# EAGLE board lcd_midi_interface_a (EAGLE 5.06)
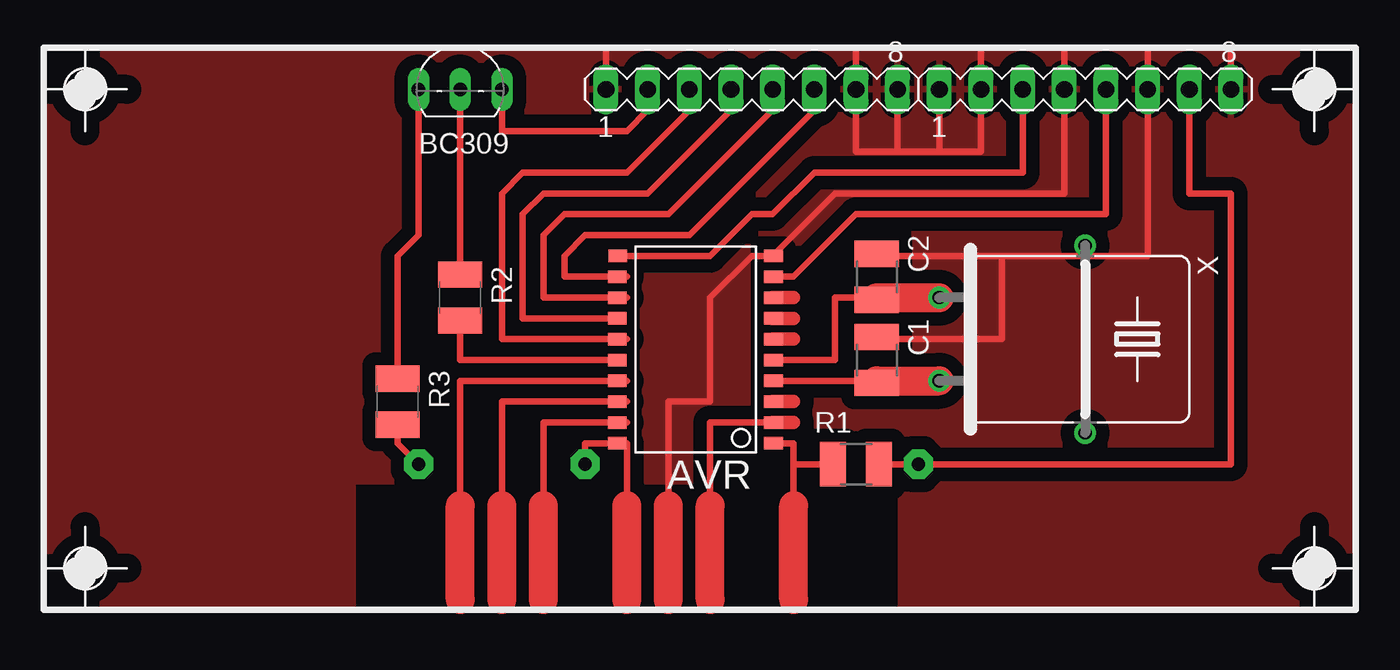
[diagram p0: board, top side]
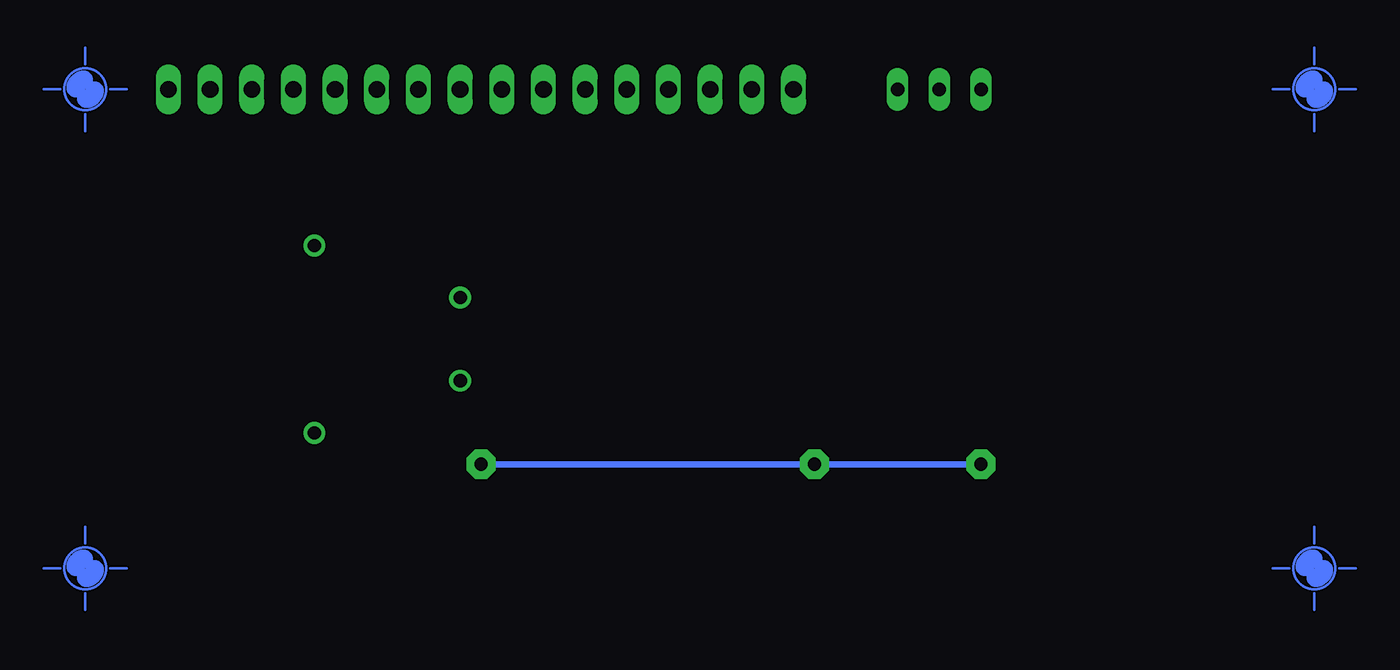
[diagram p1: board, bottom side, seen from below]

No outline drawn. Coordinates in mm, seen from the top.
Copper layers (1*16): Top 0.035mm / dielectric 1.5mm / Bottom 0.035mm
Design rules "default": minimum track width 10mil, minimum drill 24mil, track to track 32mil, track to pad 32mil, pad to pad 32mil, via to via 32mil, smd to smd 32mil, copper to edge 40mil, drill to drill 8mil, minimum pad ring 10mil, minimum via ring 8mil, stop-mask expansion 4mil, vias tented up to drill 0mil, thermal gap 10mil
tRestrict: area 8.9,0 to 41.9,7.6

## Footprints (pad centres in the part's own frame; a part is rotated, then mirrored left to right if it is on the bottom)
SO20L = smd 0.762 x 1.143: 1 -5.08,-5.131; 2 -3.81,-5.131; 3 -2.54,-5.131; 4 -1.27,-5.131; 5 0,-5.131; 6 1.27,-5.131; 7 2.54,-5.131; 8 3.81,-5.131; 9 5.08,-5.131; 10 6.35,-5.131; 11 6.35,4.369; 12 5.08,4.394; 13 3.81,4.394; 14 2.54,4.394; 15 1.27,4.394; 16 0,4.394; 17 -1.27,4.394; 18 -2.54,4.394; 19 -3.81,4.394; 20 -5.08,4.394
TO92-BEC = drill 0.813 long: B -2.54,0; C 2.54,0; E 0,0
R3225 = smd 1.6 x 2.7: 1 -1.4,0; 2 1.4,0
MA08-1 = drill 1.016 long: 1 -8.89,0; 2 -6.35,0; 3 -3.81,0; 4 -1.27,0; 5 1.27,0; 6 3.81,0; 7 6.35,0; 8 8.89,0
C3225 = smd 1.6 x 2.7: 1 -1.4,0; 2 1.4,0
HC18U-H = drill 0.813 round: 1 -2.54,-5.08; 2 2.54,-5.08; M -5.715,3.81; M1 5.715,3.81

## Placement (x,y rotation side)
AVR  ATTiny2313  [SO20L]  29.21,15.24 90 top
BC309  [TO92-BEC]  15.24,31.75 0 top
C1  22p  [R3225]  40.64,15.24 270 top
C2  22p  [R3225]  40.64,20.32 270 top
E$1  LCD 16x2 (HD44780 compatible)  [MA08-1]  33.02,31.75 0 top
E$2  [MA08-1]  53.34,31.75 0 top
E$5  [PASS-ROUND]  -7.62,31.75 0 top
E$10  [PASS-ROUND]  -7.62,2.54 0 top
E$11  [PASS-ROUND]  67.31,31.75 0 top
E$12  [PASS-ROUND]  67.31,2.54 0 top
R1  10k  [R3225]  39.37,8.89 0 top
R2  1k  [C3225]  15.24,19.05 270 top
R3  22  [C3225]  11.43,12.7 270 top
X  8.000 MHz  [HC18U-H]  49.53,16.51 270 top

## Library data of the parts
AVR = atmel
BC309 = transistor
C1 C2 R1-R3 = smd-ipc
E$1 E$2 = con-lstb
E$5 E$10-E$12 = marks
X = crystal

## Nets
GND: E$1.1 E$1.7 E$1.8 E$2.1 E$2.2 E$2.4 E$2.6 E$2.8
S$9: X.1
S$10: BC309.C E$1.2
S$12: X.2
S$14: BC309.B
S$15: E$1.6
S$16: E$1.5
S$17: E$1.4
S$18: E$1.3
S$21: BC309.E
S$22: E$2.3
S$32: E$2.7

## Tracks (layer width: path | path; a pad name or v marks a point on that pad's centre or on a via)
GND
  Top 0.406: E$2.8 62.23,34.29 57.15,34.29 | E$1.1 24.13,34.29 39.37,34.29 E$1.7 39.37,27.94 41.91,27.94 | 41.91,27.94 E$1.8 | 44.45,27.94 E$2.1 | 44.45,27.94 41.91,27.94 | 44.45,27.94 46.99,27.94 E$2.2 46.99,34.29 52.07,34.29 | 40.64,21.59 57.15,21.59 E$2.6 57.15,34.29 | 52.07,34.29 57.15,34.29 | 52.07,34.29 E$2.4 52.07,25.4 38.1,25.4 34.29,21.59 33.02,21.59 30.48,19.05 30.48,12.7 27.94,12.7 27.94,6.35 | 43.18,21.59 48.26,21.59 48.26,16.51 40.64,16.51
  Top 1.778: 27.94,0.64 27.94,6.35
  pour Top: -10.16,34.29 -10.16,0 69.85,0 69.85,34.29
S$2
  Top 0.406: 25.4,13.97 15.24,13.97 15.24,6.35
  Top 1.778: 15.24,0.64 15.24,6.35
S$3
  Top 0.406: 25.4,12.7 17.78,12.7 17.78,6.35
  Top 1.778: 17.78,0.64 17.78,6.35
S$4
  Top 0.406: 25.4,11.43 20.32,11.43 20.32,6.35
  Top 1.778: 20.32,0.64 20.32,6.35
S$5
  Top 0.406: 34.29,10.16 35.56,10.16 35.56,8.89 | 35.56,6.35 35.56,8.89 | 35.56,8.89 38.1,8.89
  Top 1.778: 35.56,0.64 35.56,6.35
S$8
  Top 0.406: 34.29,11.43 30.48,11.43 30.48,6.35
  Top 0.813: 34.29,11.43 35.56,11.43
  Top 1.778: 30.48,0.64 30.48,6.35
S$9
  Top 1.778: 40.64,19.05 X.1
S$10
  Top 0.406: BC309.C 17.78,29.21 25.4,29.21 26.67,30.48 E$1.2
S$11
  Top 0.406: 34.29,13.97 39.37,13.97
S$12
  Top 1.778: 40.64,13.97 X.2
S$13
  Top 0.406: 34.29,15.24 38.1,15.24 38.1,19.05 39.37,19.05
S$14
  Top 0.406: 11.43,13.97 11.43,21.59 12.7,22.86 BC309.B
S$15
  Top 0.406: 25.4,20.32 21.59,20.32 21.59,21.59 22.86,22.86 29.21,22.86 36.83,30.48 E$1.6
S$16
  Top 0.406: 25.4,19.05 20.32,19.05 20.32,22.86 21.59,24.13 27.94,24.13 34.29,30.48 E$1.5
S$17
  Top 0.406: 24.13,17.78 19.05,17.78 19.05,24.13 20.32,25.4 26.67,25.4 31.75,30.48 E$1.4
S$18
  Top 0.406: 25.4,16.51 17.78,16.51 17.78,25.4 19.05,26.67 25.4,26.67 29.21,30.48 E$1.3
S$19
  Top 0.406: 24.13,15.24 15.24,15.24 15.24,17.78
S$20
  Top 0.813: 34.29,19.05 35.56,19.05
S$21
  Top 0.406: 15.24,20.32 BC309.E
S$22
  Top 0.406: 25.4,21.59 30.48,21.59 33.02,24.13 34.29,24.13 36.83,26.67 49.53,26.67 E$2.3
S$23
  Top 0.406: 34.29,20.32 35.56,20.32 39.37,24.13 54.61,24.13 54.61,31.75
S$25
  Top 0.406: 25.4,6.35 25.4,10.16
  Top 1.778: 25.4,0.64 25.4,6.35
S$27
  Top 0.813: 34.29,17.78 35.56,17.78
S$28
  Top 0.813: 34.29,16.51 35.56,16.51
S$29
  Top 0.813: 34.29,12.7 35.56,12.7
S$32  (via drill 0.8 pad 1.78)
  Top 0.406: v12.7,8.89 11.43,10.16 11.43,11.43 | 24.13,10.16 22.86,10.16 v22.86,8.89 | E$2.7 59.69,25.4 62.23,25.4 62.23,8.89 v43.18,8.89 40.64,8.89
  Bottom 0.406: v12.7,8.89 v22.86,8.89 v43.18,8.89

## Text on the board
tValues: 16 | 1 | MOSI / DI | MISO / DO | SCLK | Vcc (5V) | GND | MIDI | !RESET